# EAGLE board IOB-Adapter-Generic_array (EAGLE 7.7.0)
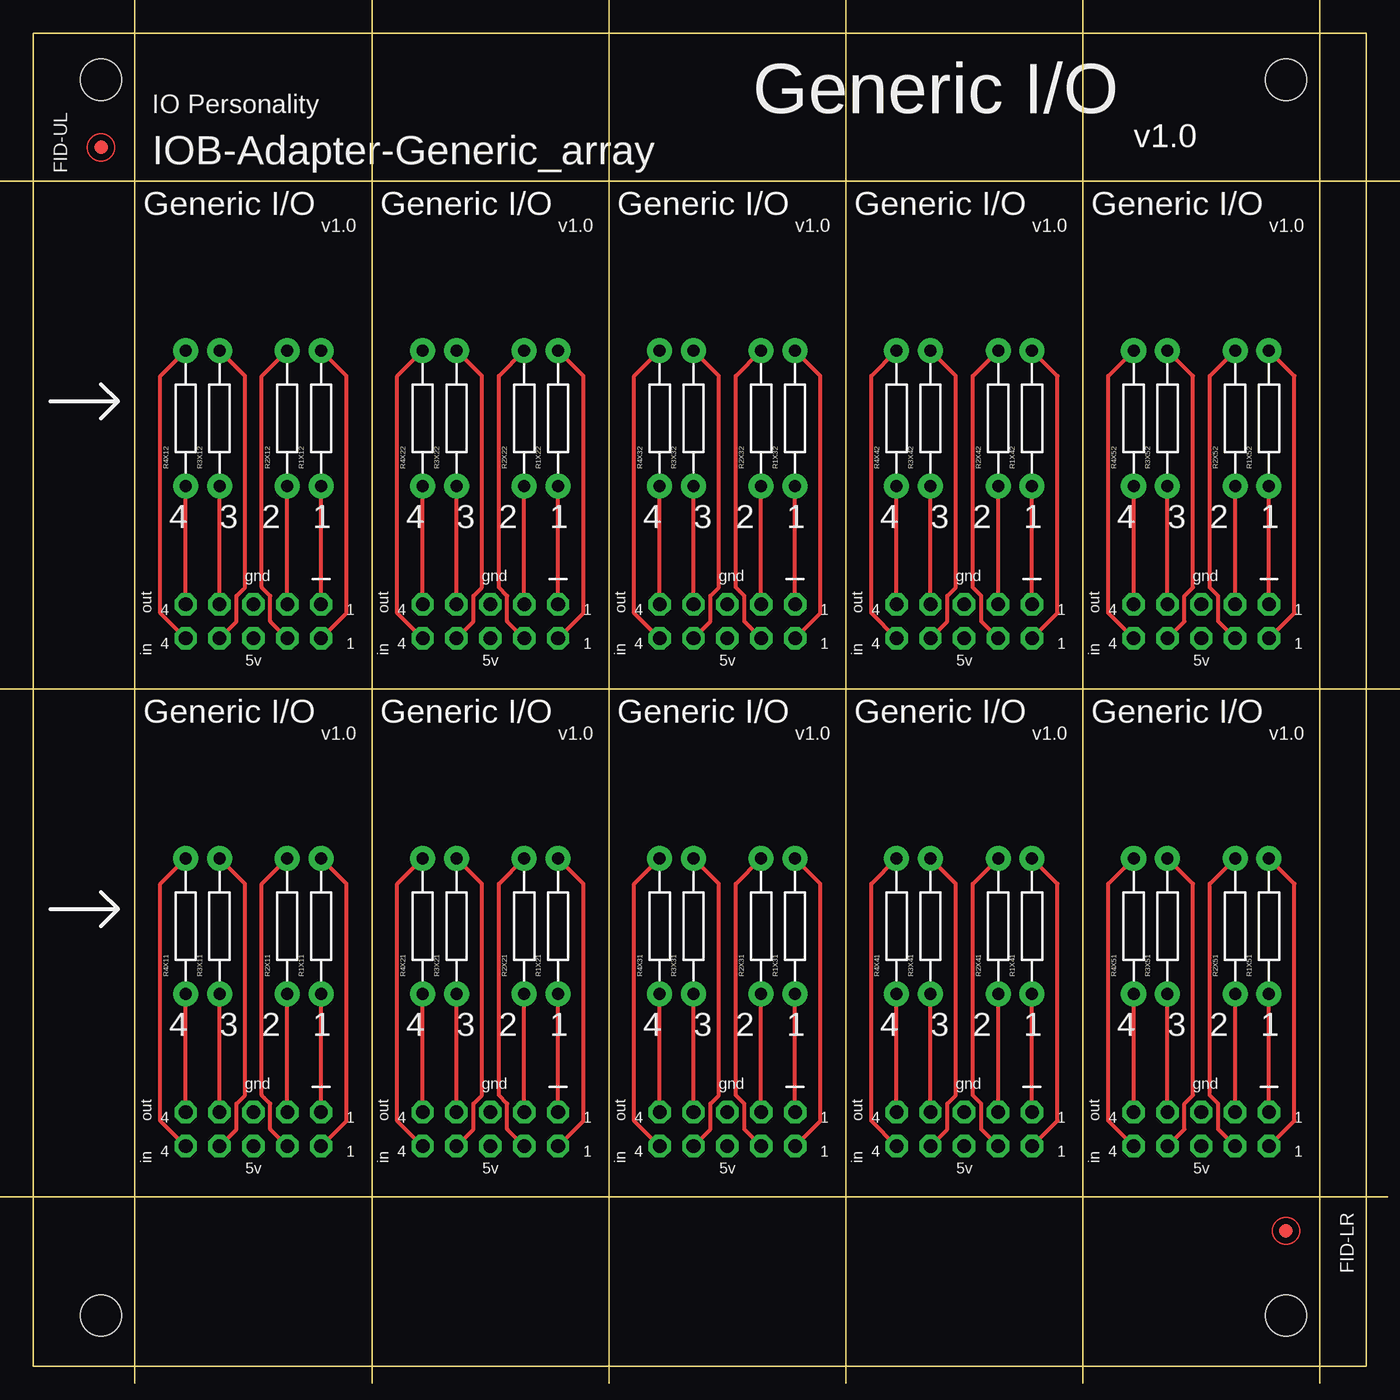
[diagram p0: board, top side]
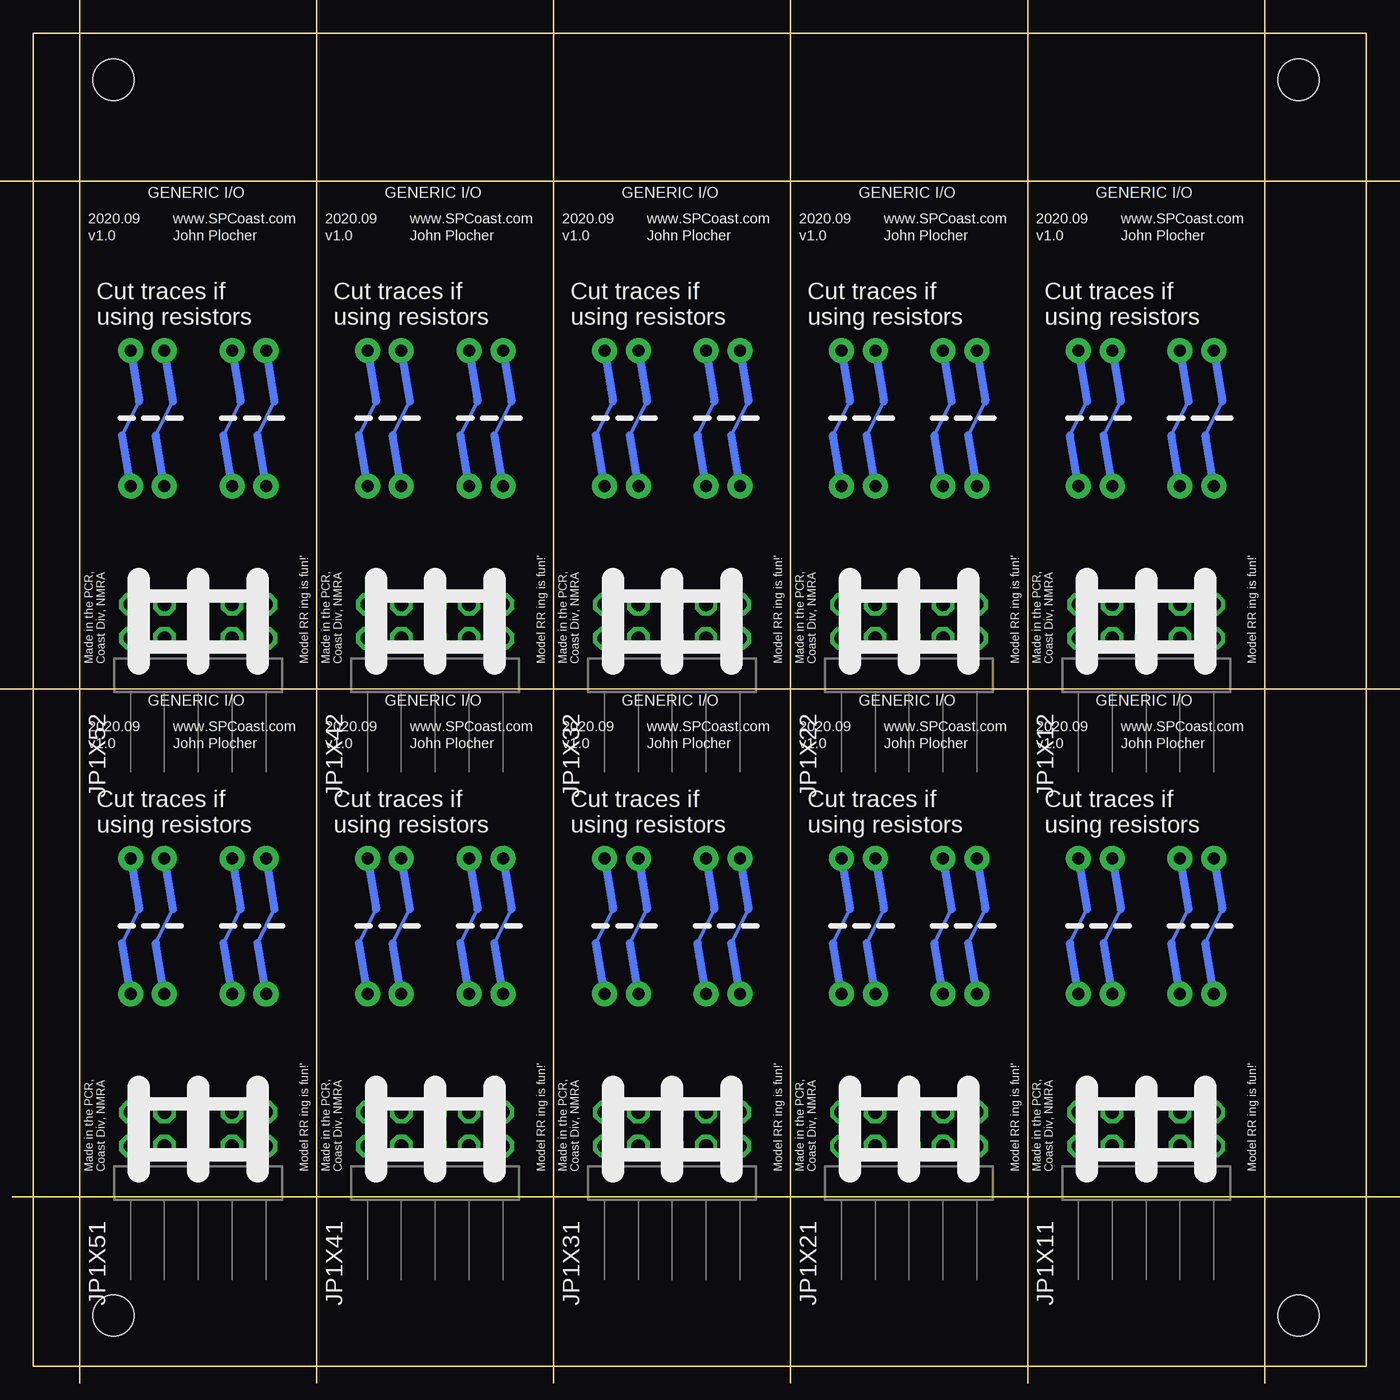
[diagram p1: board, bottom side, seen from below]

Size 100 x 100 mm. Coordinates in mm from the lower left corner, seen from the top.
Copper layers (1*16): Top 0.035mm / dielectric 1.5mm / Bottom 0.035mm
Design rules "default": minimum track width 10mil, minimum drill 0.6mm, track to track 8mil, track to pad 8mil, pad to pad 8mil, via to via 8mil, smd to smd 8mil, copper to edge 40mil, drill to drill 8mil, minimum pad ring 10mil, minimum via ring 8mil, stop-mask expansion 4mil, vias tented up to drill 0mil, thermal gap 10mil

## Footprints (pad centres in the part's own frame; a part is rotated, then mirrored left to right if it is on the bottom)
BOARD-DINRAIL-3.17IN-5X2-IOP = hole 3.1: 5.08,96.52; 93.98,96.52; 5.08,3.81; 93.98,3.81
FIDUCIAL_1MM = smd 1 x 1: 1 0,0
IOB-V3-MODULE = drill 1.016 pad 1.676 octagon: 1 -1.27,-5.08; 2 1.27,-5.08; 3 -1.27,-2.54; 4 1.27,-2.54; 5 -1.27,0; 6 1.27,0; 7 -1.27,2.54; 8 1.27,2.54; 9 -1.27,5.08; 10 1.27,5.08
CUT-R = drill 0.9 pad 1.88: P1 5.08,0; P2 -5.08,0

## Placement (x,y rotation side)
CARRIER  BOARD  [BOARD-DINRAIL-3.17IN-5X2-IOP]  0,0 0 top
FID-LR  FIDUCIAL  [FIDUCIAL_1MM]  93.98,10.16 0 top
FID-UL  FIDUCIAL  [FIDUCIAL_1MM]  5.08,91.44 0 top
JP1X11  CONNECTOR-M05X2  [IOB-V3-MODULE]  16.51,17.78 270 bottom
JP1X12  CONNECTOR-M05X2  [IOB-V3-MODULE]  16.51,55.88 270 bottom
JP1X21  CONNECTOR-M05X2  [IOB-V3-MODULE]  34.29,17.78 270 bottom
JP1X22  CONNECTOR-M05X2  [IOB-V3-MODULE]  34.29,55.88 270 bottom
JP1X31  CONNECTOR-M05X2  [IOB-V3-MODULE]  52.07,17.78 270 bottom
JP1X32  CONNECTOR-M05X2  [IOB-V3-MODULE]  52.07,55.88 270 bottom
JP1X41  CONNECTOR-M05X2  [IOB-V3-MODULE]  69.85,17.78 270 bottom
JP1X42  CONNECTOR-M05X2  [IOB-V3-MODULE]  69.85,55.88 270 bottom
JP1X51  CONNECTOR-M05X2  [IOB-V3-MODULE]  87.63,17.78 270 bottom
JP1X52  CONNECTOR-M05X2  [IOB-V3-MODULE]  87.63,55.88 270 bottom
R1X11  NOSTUFF  [CUT-R]  21.59,33.02 90 top
R1X12  NOSTUFF  [CUT-R]  21.59,71.12 90 top
R1X21  NOSTUFF  [CUT-R]  39.37,33.02 90 top
R1X22  NOSTUFF  [CUT-R]  39.37,71.12 90 top
R1X31  NOSTUFF  [CUT-R]  57.15,33.02 90 top
R1X32  NOSTUFF  [CUT-R]  57.15,71.12 90 top
R1X41  NOSTUFF  [CUT-R]  74.93,33.02 90 top
R1X42  NOSTUFF  [CUT-R]  74.93,71.12 90 top
R1X51  NOSTUFF  [CUT-R]  92.71,33.02 90 top
R1X52  NOSTUFF  [CUT-R]  92.71,71.12 90 top
R2X11  NOSTUFF  [CUT-R]  19.05,33.02 90 top
R2X12  NOSTUFF  [CUT-R]  19.05,71.12 90 top
R2X21  NOSTUFF  [CUT-R]  36.83,33.02 90 top
R2X22  NOSTUFF  [CUT-R]  36.83,71.12 90 top
R2X31  NOSTUFF  [CUT-R]  54.61,33.02 90 top
R2X32  NOSTUFF  [CUT-R]  54.61,71.12 90 top
R2X41  NOSTUFF  [CUT-R]  72.39,33.02 90 top
R2X42  NOSTUFF  [CUT-R]  72.39,71.12 90 top
R2X51  NOSTUFF  [CUT-R]  90.17,33.02 90 top
R2X52  NOSTUFF  [CUT-R]  90.17,71.12 90 top
R3X11  NOSTUFF  [CUT-R]  13.97,33.02 90 top
R3X12  NOSTUFF  [CUT-R]  13.97,71.12 90 top
R3X21  NOSTUFF  [CUT-R]  31.75,33.02 90 top
R3X22  NOSTUFF  [CUT-R]  31.75,71.12 90 top
R3X31  NOSTUFF  [CUT-R]  49.53,33.02 90 top
R3X32  NOSTUFF  [CUT-R]  49.53,71.12 90 top
R3X41  NOSTUFF  [CUT-R]  67.31,33.02 90 top
R3X42  NOSTUFF  [CUT-R]  67.31,71.12 90 top
R3X51  NOSTUFF  [CUT-R]  85.09,33.02 90 top
R3X52  NOSTUFF  [CUT-R]  85.09,71.12 90 top
R4X11  NOSTUFF  [CUT-R]  11.43,33.02 90 top
R4X12  NOSTUFF  [CUT-R]  11.43,71.12 90 top
R4X21  NOSTUFF  [CUT-R]  29.21,33.02 90 top
R4X22  NOSTUFF  [CUT-R]  29.21,71.12 90 top
R4X31  NOSTUFF  [CUT-R]  46.99,33.02 90 top
R4X32  NOSTUFF  [CUT-R]  46.99,71.12 90 top
R4X41  NOSTUFF  [CUT-R]  64.77,33.02 90 top
R4X42  NOSTUFF  [CUT-R]  64.77,71.12 90 top
R4X51  NOSTUFF  [CUT-R]  82.55,33.02 90 top
R4X52  NOSTUFF  [CUT-R]  82.55,71.12 90 top

## Library data of the parts
CARRIER FID-LR FID-UL JP1X11 JP1X12 JP1X21 JP1X22 JP1X31 JP1X32 JP1X41 JP1X42 JP1X51 JP1X52 R1X11 R1X12 R1X21 R1X22 R1X31 R1X32 R1X41 R1X42 R1X51 R1X52 R2X11 R2X12 R2X21 R2X22 R2X31 R2X32 R2X41 R2X42 R2X51 R2X52 R3X11 R3X12 R3X21 R3X22 R3X31 R3X32 R3X41 R3X42 R3X51 R3X52 R4X11 R4X12 R4X21 R4X22 R4X31 R4X32 R4X41 R4X42 R4X51 R4X52 = SPCoast

## Nets
GNDX11: JP1X11.5
GNDX12: JP1X12.5
GNDX21: JP1X21.5
GNDX22: JP1X22.5
GNDX31: JP1X31.5
GNDX32: JP1X32.5
GNDX41: JP1X41.5
GNDX42: JP1X42.5
GNDX51: JP1X51.5
GNDX52: JP1X52.5
N$1X11: JP1X11.1 R1X11.P2
N$1X12: JP1X12.1 R1X12.P2
N$1X21: JP1X21.1 R1X21.P2
N$1X22: JP1X22.1 R1X22.P2
N$1X31: JP1X31.1 R1X31.P2
N$1X32: JP1X32.1 R1X32.P2
N$1X41: JP1X41.1 R1X41.P2
N$1X42: JP1X42.1 R1X42.P2
N$1X51: JP1X51.1 R1X51.P2
N$1X52: JP1X52.1 R1X52.P2
N$2X11: JP1X11.3 R2X11.P2
N$2X12: JP1X12.3 R2X12.P2
N$2X21: JP1X21.3 R2X21.P2
N$2X22: JP1X22.3 R2X22.P2
N$2X31: JP1X31.3 R2X31.P2
N$2X32: JP1X32.3 R2X32.P2
N$2X41: JP1X41.3 R2X41.P2
N$2X42: JP1X42.3 R2X42.P2
N$2X51: JP1X51.3 R2X51.P2
N$2X52: JP1X52.3 R2X52.P2
N$3X11: JP1X11.7 R3X11.P2
N$3X12: JP1X12.7 R3X12.P2
N$3X21: JP1X21.7 R3X21.P2
N$3X22: JP1X22.7 R3X22.P2
N$3X31: JP1X31.7 R3X31.P2
N$3X32: JP1X32.7 R3X32.P2
N$3X41: JP1X41.7 R3X41.P2
N$3X42: JP1X42.7 R3X42.P2
N$3X51: JP1X51.7 R3X51.P2
N$3X52: JP1X52.7 R3X52.P2
N$4X11: JP1X11.9 R4X11.P2
N$4X12: JP1X12.9 R4X12.P2
N$4X21: JP1X21.9 R4X21.P2
N$4X22: JP1X22.9 R4X22.P2
N$4X31: JP1X31.9 R4X31.P2
N$4X32: JP1X32.9 R4X32.P2
N$4X41: JP1X41.9 R4X41.P2
N$4X42: JP1X42.9 R4X42.P2
N$4X51: JP1X51.9 R4X51.P2
N$4X52: JP1X52.9 R4X52.P2
P1X11: JP1X11.2 R1X11.P1
P1X12: JP1X12.2 R1X12.P1
P1X21: JP1X21.2 R1X21.P1
P1X22: JP1X22.2 R1X22.P1
P1X31: JP1X31.2 R1X31.P1
P1X32: JP1X32.2 R1X32.P1
P1X41: JP1X41.2 R1X41.P1
P1X42: JP1X42.2 R1X42.P1
P1X51: JP1X51.2 R1X51.P1
P1X52: JP1X52.2 R1X52.P1
P2X11: JP1X11.4 R2X11.P1
P2X12: JP1X12.4 R2X12.P1
P2X21: JP1X21.4 R2X21.P1
P2X22: JP1X22.4 R2X22.P1
P2X31: JP1X31.4 R2X31.P1
P2X32: JP1X32.4 R2X32.P1
P2X41: JP1X41.4 R2X41.P1
P2X42: JP1X42.4 R2X42.P1
P2X51: JP1X51.4 R2X51.P1
P2X52: JP1X52.4 R2X52.P1
P3X11: JP1X11.8 R3X11.P1
P3X12: JP1X12.8 R3X12.P1
P3X21: JP1X21.8 R3X21.P1
P3X22: JP1X22.8 R3X22.P1
P3X31: JP1X31.8 R3X31.P1
P3X32: JP1X32.8 R3X32.P1
P3X41: JP1X41.8 R3X41.P1
P3X42: JP1X42.8 R3X42.P1
P3X51: JP1X51.8 R3X51.P1
P3X52: JP1X52.8 R3X52.P1
P4X11: JP1X11.10 R4X11.P1
P4X12: JP1X12.10 R4X12.P1
P4X21: JP1X21.10 R4X21.P1
P4X22: JP1X22.10 R4X22.P1
P4X31: JP1X31.10 R4X31.P1
P4X32: JP1X32.10 R4X32.P1
P4X41: JP1X41.10 R4X41.P1
P4X42: JP1X42.10 R4X42.P1
P4X51: JP1X51.10 R4X51.P1
P4X52: JP1X52.10 R4X52.P1
VCCX11: JP1X11.6
VCCX12: JP1X12.6
VCCX21: JP1X21.6
VCCX22: JP1X22.6
VCCX31: JP1X31.6
VCCX32: JP1X32.6
VCCX41: JP1X41.6
VCCX42: JP1X42.6
VCCX51: JP1X51.6
VCCX52: JP1X52.6

## Tracks (layer width: path | path; a pad name or v marks a point on that pad's centre or on a via)
N$1X11
  Top 0.305: JP1X11.1 R1X11.P2
N$1X12
  Top 0.305: JP1X12.1 R1X12.P2
N$1X21
  Top 0.305: JP1X21.1 R1X21.P2
N$1X22
  Top 0.305: JP1X22.1 R1X22.P2
N$1X31
  Top 0.305: JP1X31.1 R1X31.P2
N$1X32
  Top 0.305: JP1X32.1 R1X32.P2
N$1X41
  Top 0.305: JP1X41.1 R1X41.P2
N$1X42
  Top 0.305: JP1X42.1 R1X42.P2
N$1X51
  Top 0.305: JP1X51.1 R1X51.P2
N$1X52
  Top 0.305: JP1X52.1 R1X52.P2
N$2X11
  Top 0.305: JP1X11.3 R2X11.P2
N$2X12
  Top 0.305: JP1X12.3 R2X12.P2
N$2X21
  Top 0.305: JP1X21.3 R2X21.P2
N$2X22
  Top 0.305: JP1X22.3 R2X22.P2
N$2X31
  Top 0.305: JP1X31.3 R2X31.P2
N$2X32
  Top 0.305: JP1X32.3 R2X32.P2
N$2X41
  Top 0.305: JP1X41.3 R2X41.P2
N$2X42
  Top 0.305: JP1X42.3 R2X42.P2
N$2X51
  Top 0.305: JP1X51.3 R2X51.P2
N$2X52
  Top 0.305: JP1X52.3 R2X52.P2
N$3X11
  Top 0.305: JP1X11.7 R3X11.P2
N$3X12
  Top 0.305: JP1X12.7 R3X12.P2
N$3X21
  Top 0.305: JP1X21.7 R3X21.P2
N$3X22
  Top 0.305: JP1X22.7 R3X22.P2
N$3X31
  Top 0.305: JP1X31.7 R3X31.P2
N$3X32
  Top 0.305: JP1X32.7 R3X32.P2
N$3X41
  Top 0.305: JP1X41.7 R3X41.P2
N$3X42
  Top 0.305: JP1X42.7 R3X42.P2
N$3X51
  Top 0.305: JP1X51.7 R3X51.P2
N$3X52
  Top 0.305: JP1X52.7 R3X52.P2
N$4X11
  Top 0.305: JP1X11.9 R4X11.P2
N$4X12
  Top 0.305: JP1X12.9 R4X12.P2
N$4X21
  Top 0.305: JP1X21.9 R4X21.P2
N$4X22
  Top 0.305: JP1X22.9 R4X22.P2
N$4X31
  Top 0.305: JP1X31.9 R4X31.P2
N$4X32
  Top 0.305: JP1X32.9 R4X32.P2
N$4X41
  Top 0.305: JP1X41.9 R4X41.P2
N$4X42
  Top 0.305: JP1X42.9 R4X42.P2
N$4X51
  Top 0.305: JP1X51.9 R4X51.P2
N$4X52
  Top 0.305: JP1X52.9 R4X52.P2
P1X11
  Top 0.305: JP1X11.2 23.5,18.41 23.5,36.2 R1X11.P1
P1X12
  Top 0.305: JP1X12.2 23.5,56.52 23.5,74.3 R1X12.P1
P1X21
  Top 0.305: JP1X21.2 41.27,18.41 41.27,36.2 R1X21.P1
P1X22
  Top 0.305: JP1X22.2 41.27,56.52 41.27,74.3 R1X22.P1
P1X31
  Top 0.305: JP1X31.2 59.05,18.41 59.05,36.2 R1X31.P1
P1X32
  Top 0.305: JP1X32.2 59.05,56.52 59.05,74.3 R1X32.P1
P1X41
  Top 0.305: JP1X41.2 76.83,18.41 76.83,36.2 R1X41.P1
P1X42
  Top 0.305: JP1X42.2 76.83,56.52 76.83,74.3 R1X42.P1
P1X51
  Top 0.305: JP1X51.2 94.61,18.41 94.61,36.2 R1X51.P1
P1X52
  Top 0.305: JP1X52.2 94.61,56.52 94.61,74.3 R1X52.P1
P2X11
  Top 0.305: JP1X11.4 17.78,17.78 17.78,19.68 17.14,20.32 17.14,36.2 R2X11.P1
P2X12
  Top 0.305: JP1X12.4 17.78,55.88 17.78,57.78 17.14,58.42 17.14,74.3 R2X12.P1
P2X21
  Top 0.305: JP1X21.4 35.56,17.78 35.56,19.68 34.92,20.32 34.92,36.2 R2X21.P1
P2X22
  Top 0.305: JP1X22.4 35.56,55.88 35.56,57.78 34.92,58.42 34.92,74.3 R2X22.P1
P2X31
  Top 0.305: JP1X31.4 53.34,17.78 53.34,19.68 52.7,20.32 52.7,36.2 R2X31.P1
P2X32
  Top 0.305: JP1X32.4 53.34,55.88 53.34,57.78 52.7,58.42 52.7,74.3 R2X32.P1
P2X41
  Top 0.305: JP1X41.4 71.12,17.78 71.12,19.68 70.48,20.32 70.48,36.2 R2X41.P1
P2X42
  Top 0.305: JP1X42.4 71.12,55.88 71.12,57.78 70.48,58.42 70.48,74.3 R2X42.P1
P2X51
  Top 0.305: JP1X51.4 88.9,17.78 88.9,19.68 88.27,20.32 88.27,36.2 R2X51.P1
P2X52
  Top 0.305: JP1X52.4 88.9,55.88 88.9,57.78 88.27,58.42 88.27,74.3 R2X52.P1
P3X11
  Top 0.305: JP1X11.8 15.24,17.78 15.24,19.68 15.88,20.32 15.88,36.2 R3X11.P1
P3X12
  Top 0.305: JP1X12.8 15.24,55.88 15.24,57.78 15.88,58.42 15.88,74.3 R3X12.P1
P3X21
  Top 0.305: JP1X21.8 33.02,17.78 33.02,19.68 33.66,20.32 33.66,36.2 R3X21.P1
P3X22
  Top 0.305: JP1X22.8 33.02,55.88 33.02,57.78 33.66,58.42 33.66,74.3 R3X22.P1
P3X31
  Top 0.305: JP1X31.8 50.8,17.78 50.8,19.68 51.44,20.32 51.44,36.2 R3X31.P1
P3X32
  Top 0.305: JP1X32.8 50.8,55.88 50.8,57.78 51.44,58.42 51.44,74.3 R3X32.P1
P3X41
  Top 0.305: JP1X41.8 68.58,17.78 68.58,19.68 69.22,20.32 69.22,36.2 R3X41.P1
P3X42
  Top 0.305: JP1X42.8 68.58,55.88 68.58,57.78 69.22,58.42 69.22,74.3 R3X42.P1
P3X51
  Top 0.305: JP1X51.8 86.36,17.78 86.36,19.68 87,20.32 87,36.2 R3X51.P1
P3X52
  Top 0.305: JP1X52.8 86.36,55.88 86.36,57.78 87,58.42 87,74.3 R3X52.P1
P4X11
  Top 0.305: JP1X11.10 9.53,18.41 9.53,36.2 R4X11.P1
P4X12
  Top 0.305: JP1X12.10 9.53,56.52 9.53,74.3 R4X12.P1
P4X21
  Top 0.305: JP1X21.10 27.3,18.41 27.3,36.2 R4X21.P1
P4X22
  Top 0.305: JP1X22.10 27.3,56.52 27.3,74.3 R4X22.P1
P4X31
  Top 0.305: JP1X31.10 45.09,18.41 45.09,36.2 R4X31.P1
P4X32
  Top 0.305: JP1X32.10 45.09,56.52 45.09,74.3 R4X32.P1
P4X41
  Top 0.305: JP1X41.10 62.87,18.41 62.87,36.2 R4X41.P1
P4X42
  Top 0.305: JP1X42.10 62.87,56.52 62.87,74.3 R4X42.P1
P4X51
  Top 0.305: JP1X51.10 80.64,18.41 80.64,36.2 R4X51.P1
P4X52
  Top 0.305: JP1X52.10 80.64,56.52 80.64,74.3 R4X52.P1

## Text on the board
tPlace: Generic I/O | v1.0 | Generic I/O | Generic I/O | Generic I/O | Generic I/O | Generic I/O | v1.0 | v1.0 | v1.0 | v1.0 | v1.0 | 4 | 3 | 2 | 1 | 4 | 3 | 2 | 1 | 4 | 3 | 2 | 1 | 4 | 3 | 2 | 1 | 4 | 3 | 2 | 1 | Generic I/O | Generic I/O | Generic I/O | Generic I/O | Generic I/O | v1.0 | v1.0 | v1.0 | v1.0 | v1.0 | 4 | 3 | 2 | 1 | 4 | 3 | 2 | 1 | 4 | 3 | 2 | 1 | 4 | 3 | 2 | 1 | 4 | 3 | 2 | 1
bPlace: GENERIC I/O | GENERIC I/O | GENERIC I/O | GENERIC I/O | GENERIC I/O | www.SPCoast.com | 2020.09 | www.SPCoast.com | 2020.09 | www.SPCoast.com | 2020.09 | www.SPCoast.com | 2020.09 | www.SPCoast.com | 2020.09 | John Plocher | v1.0 | John Plocher | v1.0 | John Plocher | v1.0 | John Plocher | v1.0 | John Plocher | v1.0 | Cut traces if / using resistors | Cut traces if / using resistors | Cut traces if / using resistors | Cut traces if / using resistors | Cut traces if / using resistors | Model RR ing is fun!' | Made in the PCR, / Coast Div, NMRA | Model RR ing is fun!' | Made in the PCR, / Coast Div, NMRA | Model RR ing is fun!' | Made in the PCR, / Coast Div, NMRA | Model RR ing is fun!' | Made in the PCR, / Coast Div, NMRA | Model RR ing is fun!' | Made in the PCR, / Coast Div, NMRA | GENERIC I/O | GENERIC I/O | GENERIC I/O | GENERIC I/O | GENERIC I/O | www.SPCoast.com | 2020.09 | www.SPCoast.com | 2020.09 | www.SPCoast.com | 2020.09 | www.SPCoast.com | 2020.09 | www.SPCoast.com | 2020.09 | John Plocher | v1.0 | John Plocher | v1.0 | John Plocher | v1.0 | John Plocher | v1.0 | John Plocher | v1.0 | Cut traces if / using resistors | Cut traces if / using resistors | Cut traces if / using resistors | Cut traces if / using resistors | Cut traces if / using resistors | Model RR ing is fun!' | Made in the PCR, / Coast Div, NMRA | Model RR ing is fun!' | Made in the PCR, / Coast Div, NMRA | Model RR ing is fun!' | Made in the PCR, / Coast Div, NMRA | Model RR ing is fun!' | Made in the PCR, / Coast Div, NMRA | Model RR ing is fun!' | Made in the PCR, / Coast Div, NMRA
Document: Yellow | Yellow | Yellow | Yellow | Yellow | Yellow | Yellow | Yellow | Yellow | Yellow
_tNames: R4 | R3 | R2 | R1 | R4 | R3 | R2 | R1 | R4 | R3 | R2 | R1 | R4 | R3 | R2 | R1 | R4 | R3 | R2 | R1 | JP1 | JP1 | JP1 | JP1 | JP1 | R4 | R3 | R2 | R1 | R4 | R3 | R2 | R1 | R4 | R3 | R2 | R1 | R4 | R3 | R2 | R1 | R4 | R3 | R2 | R1 | JP1 | JP1 | JP1 | JP1 | JP1